# EAGLE board Pi_Tracker1 (EAGLE 6.5.0)
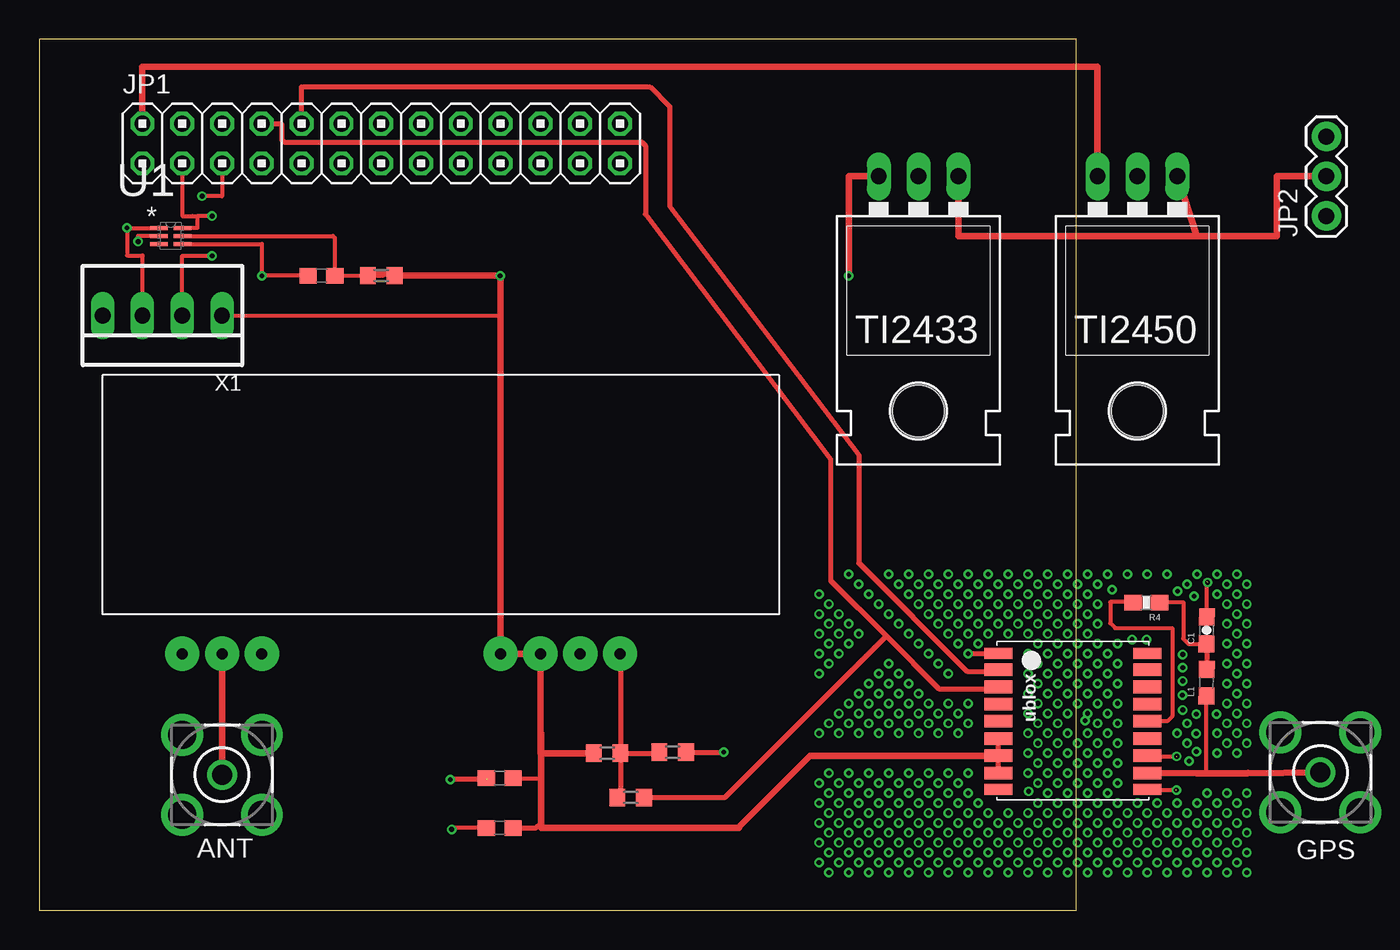
[diagram p0: board, top side]
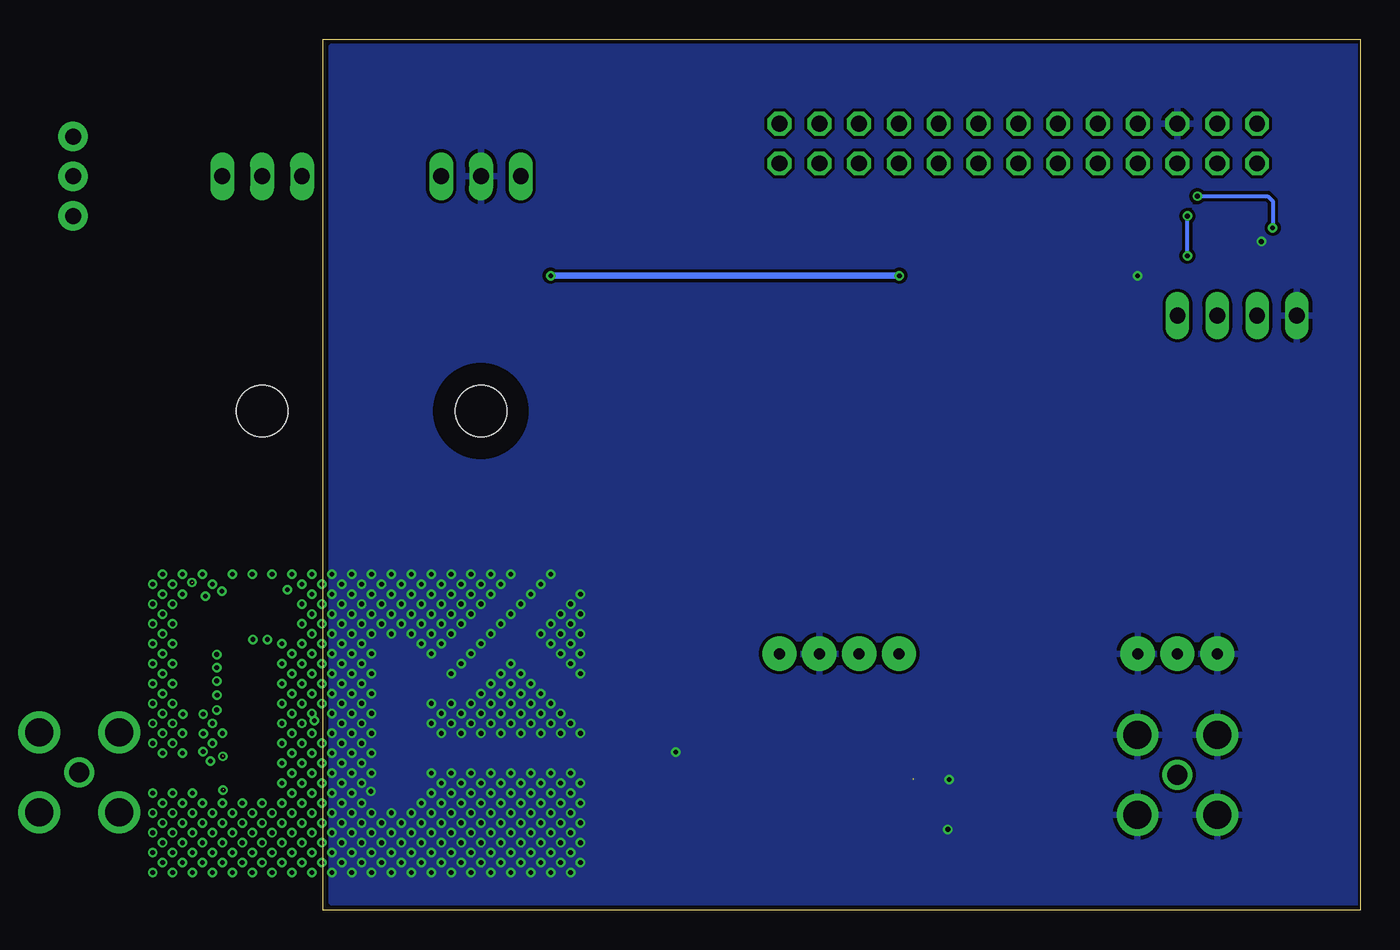
[diagram p1: board, bottom side, seen from below]

Size 66.2 x 55.61 mm. Coordinates in mm from the lower left corner, seen from the top.
Outline: 0,0 66.2,0 66.2,55.61 0,55.61 0,0
Copper layers (1*16): Top 0.035mm / dielectric 1.5mm / Bottom 0.035mm
Design rules "hackvana": minimum track width 6mil, minimum drill 0.3mm, track to track 6mil, track to pad 6mil, pad to pad 6mil, via to via 6mil, smd to smd 0mil, copper to edge 6mil, drill to drill 6mil, minimum pad ring 10mil, minimum via ring 6mil, stop-mask expansion 2mil, vias tented up to drill 100mil, thermal gap 10mil
Net classes: 0 default: clearance 0.205 mm

## Footprints (pad centres in the part's own frame; a part is rotated, then mirrored left to right if it is on the bottom)
BUS-SMA = drill 1.27: 1 0,0 | drill 1.778: 2 -2.55,2.55; 3 2.55,2.55; 4 2.55,-2.55; 5 -2.55,-2.55
0603-CAP = smd 1.1 x 1: 1 -0.85,0; 2 0.85,0
C0603 = smd 1.1 x 1: 1 -0.85,0; 2 0.85,0
2X13 = drill 1.016 octagon: 1 -15.24,-1.27; 2 -15.24,1.27; 3 -12.7,-1.27; 4 -12.7,1.27; 5 -10.16,-1.27; 6 -10.16,1.27; 7 -7.62,-1.27; 8 -7.62,1.27; 9 -5.08,-1.27; 10 -5.08,1.27; 11 -2.54,-1.27; 12 -2.54,1.27; 13 0,-1.27; 14 0,1.27; 15 2.54,-1.27; 16 2.54,1.27; 17 5.08,-1.27; 18 5.08,1.27; 19 7.62,-1.27; 20 7.62,1.27; 21 10.16,-1.27; 22 10.16,1.27; 23 12.7,-1.27; 24 12.7,1.27; 25 15.24,-1.27; 26 15.24,1.27
1X03 = drill 1.016 pad 1.88: 1 0,0; 2 2.54,0; 3 5.08,0
0603 = smd 1.1 x 1: 1 -0.85,0; 2 0.85,0
R0603 = smd 1 x 1.1: 1 -0.85,0; 2 0.85,0
0603-RES = smd 1.1 x 1: 1 -0.85,0; 2 0.85,0
TO-220-ALT = drill 1.016 long: GND 0,-3.81; IN -2.54,-3.81; OUT 2.54,-3.81 | hole 3.302: 0,11.176
SOT50P160X60-6N = smd 1.118 x 0.254: 1 -0.737,0.508; 2 -0.737,0; 3 -0.737,-0.508; 4 0.737,-0.508; 5 0.737,0; 6 0.737,0.508
NTX2 = drill 0.7 pad 2.184: 0V -2.54,-10.16; EN -7.62,-10.16; RFGND -22.86,-10.16; RFGND2 -27.94,-10.16; RFOUT -25.4,-10.16; TXD 0,-10.16; VCC -5.08,-10.16
UBLOX_MAX = smd 1.8 x 0.7: 1_GND 4.95,-4.4; 9_V_RESET 4.95,4.3; 10_GND -4.55,4.3; 18_RESERVED -4.55,-4.4 | smd 1.8 x 0.8: 2_TXD1 4.95,-3.35; 3_RXD1 4.95,-2.25; 4_TIMEPULSE 4.95,-1.15; 5_EXTINT0 4.95,-0.05; 6_V_BCKP 4.95,1.05; 7_VCC_IO 4.95,2.15; 8_VCC 4.95,3.25; 11_RF_IN -4.55,3.25; 12_GND -4.55,2.15; 13_ANTON -4.55,1.05; 14_VCC_RF -4.55,-0.05; 15_RESERVED -4.55,-1.15; 16_SDA2 -4.55,-2.25; 17_SCL2 -4.55,-3.35
22-23-2041 = drill 1 long: 1 -3.81,0; 2 -1.27,0; 3 1.27,0; 4 3.81,0

## Placement (x,y rotation side)
ANT  BUS-SMA  [BUS-SMA]  11.67,8.65 0 top
C1  47pf  [0603-CAP]  74.51,17.87 89.2 top  (outside the outline)
C2  20nf  [C0603]  18.02,40.51 0 top
C3  1.0uf  [C0603]  29.39,5.26 0 top
C4  0.1uf  [C0603]  29.39,8.43 0 top
GPS  BUS-SMA  [BUS-SMA]  81.77,8.81 0 top  (outside the outline)
JP1  [2X13]  21.83,48.95 0 top
JP2  [1X03]  82.16,44.32 90 top  (outside the outline)
L1  27nh  [0603]  74.51,14.53 89.4 top  (outside the outline)
R1  32k  [R0603]  37.75,7.21 0 top
R2  4k7  [R0603]  36.25,10.04 180 top
R3  4k7  [R0603]  40.44,10.1 180 top
R4  10 ohm  [0603-RES]  70.67,19.65 180 top  (outside the outline)
R5  4k7  [R0603]  21.83,40.51 0 top
TI2433  3v3  [TO-220-ALT]  56.12,43.05 180 top
TI2450  5v  [TO-220-ALT]  70.09,43.05 180 top
U1  TMP102AIDRLT  [SOT50P160X60-6N]  8.4,43.05 0 top
U$1  NTX2  [NTX2]  37.07,26.54 0 top
U$2  UBLOX_MAX  [UBLOX_MAX]  66.17,12.02 180 top
X1  22-23-2041  [22-23-2041]  7.86,37.97 180 top

## Library data of the parts
ANT GPS U$1 U$2 = Ava
C1 = SparkFun-Capacitors
C2-C4 R1-R3 R5 = rcl
JP1 = pinhead
JP2 = SparkFun-Connectors
L1 = SparkFun-Passives
R4 = SparkFun-Resistors
TI2433 TI2450 = SparkFun-PowerIC
U1 = Ava; MPN: TMP102AIDRLT; OC_FARNELL: 1652477; OC_NEWARK: 53M3987; PACKAGE: SOT-23-6; SUPPLIER: Texas Instruments
X1 = con-molex; MF: MOLEX; MPN: 22-23-2041; OC_FARNELL: 1462920; OC_NEWARK: 38C0355

## Nets
3V3: C2.2 C3.2 C4.2 R2.2 R5.1 R5.2 TI2433.OUT U1.5 U$1.EN U$1.VCC U$2.6_V_BCKP U$2.7_VCC_IO U$2.8_VCC X1.1
9_V_RESET: U$2.9_V_RESET
GND: ANT.2 ANT.3 ANT.4 ANT.5 C1.2 C2.1 C3.1 C4.1 GPS.2 GPS.3 GPS.4 GPS.5 JP1.6 JP2.1 JP2.3 R3.1 TI2433.GND TI2450.GND U1.2 U1.4 U$1.0V U$1.RFGND U$1.RFGND2 U$2.1_GND U$2.10_GND U$2.12_GND X1.4
N$1: JP1.2 TI2450.OUT
N$2: R4.2 U$2.14_VCC_RF
N$3: C1.1 L1.2 R4.1
N$6: R1.1 R2.1 R3.2 U$1.TXD
N$9: ANT.1 U$1.RFOUT
N$13: GPS.1 L1.1 U$2.11_RF_IN
RXD: JP1.10 U$2.2_TXD1
SCL: JP1.5 U1.1 X1.3
SDA: JP1.3 U1.6 X1.2
TXD: JP1.8 R1.2 U$2.3_RXD1
VCC: JP2.2 TI2433.IN TI2450.IN

## Tracks (layer width: path | path; a pad name or v marks a point on that pad's centre or on a via)
3V3  (via drill 0.3)
  Top 0.152: R5.2 R5.1
  Top 0.254: R5.1 22.25,40.83 21.93,40.51 C2.2 18.87,42.92 18.73,43.05 U1.5 | X1.1 29.45,37.97 | C4.2 32.02,8.43 32.02,8.13
  Top 0.305: U$2.6_V_BCKP U$2.7_VCC_IO U$2.8_VCC | R2.2 | C3.2 31.69,5.26 32.02,5.59
  Top 0.406: TI2433.OUT 51.68,46.86 v51.68,40.51 | R5.2 v29.42,40.51 29.45,40.48 29.45,37.97 U$1.EN U$1.VCC 31.99,11.3 | 35.22,9.87 R2.2 32,10.04 31.99,10.03 31.99,11.3 | U$2.7_VCC_IO 49.2,9.87 44.66,5.34 44.66,5.27 32.02,5.27 32.02,5.59 32.02,8.13 32.02,11.3 31.99,11.3
  Bottom 0.406: v51.68,40.51 v29.42,40.51
GND  (via drill 0.3)  (4 unrouted)
  Top 0.254: C2.1 v14.21,40.51 14.21,42.54 U1.4 | U$2.10_GND 72.55,7.71 | U$2.12_GND 70.75,9.83 72.58,9.83 | C1.2 74.52,20.96 74.55,20.98 | U1.2 6.32,43.05 v6.32,42.69 | C3.1 26.33,5.26 v26.33,5.17
  Top 0.305: R3.1 v43.68,10.1 | U$2.1_GND 61.19,16.38 v59.3,16.38 | 28.54,8.34 28.53,8.35 v26.24,8.35
  other vias: 72.58,7.68 72.61,9.83 74.58,20.93 63.15,7.6 63.11,8.76 63.11,10.03 63.11,11.3 63.11,12.57 63.11,13.84 63.11,15.11 63.11,16.38 63.11,17.65 63.11,18.92 63.11,20.19 63.11,21.46 64.38,21.46 64.38,20.19 64.38,18.92 64.38,17.65 64.38,16.38 64.38,15.11 64.38,13.84 64.38,12.57 64.38,11.3 64.38,10.03 64.38,8.76 64.38,7.49 64.38,6.22 64.38,4.95 64.38,3.68 63.11,3.68 63.11,4.95 63.11,6.22 61.84,6.22 61.84,4.95 61.84,3.68 60.57,3.68 60.57,4.95 60.57,6.22 65.65,3.68 65.65,4.95 65.65,6.22 65.65,7.49 65.65,8.76 65.65,10.03 65.65,11.3 65.65,12.57 65.65,13.84 65.65,15.11 65.65,16.38 65.65,17.65 65.65,18.92 65.65,20.19 65.65,21.46 66.92,3.68 66.92,4.95 66.92,6.22 66.92,7.49 66.92,8.76 66.92,10.03 66.92,11.3 66.92,12.57 66.92,13.84 66.92,15.11 66.92,16.38 66.92,17.65 66.92,18.92 66.92,20.19 66.92,21.46 61.84,17.65 61.84,18.92 61.84,20.19 61.84,21.46 60.57,17.65 60.57,18.92 60.57,20.19 60.57,21.46 68.19,3.68 68.19,4.95 68.19,6.22 68.19,7.49 68.19,8.76 68.19,10.03 68.19,11.3 68.19,12.57 68.19,13.84 68.19,15.11 68.19,16.38 68.19,21.46 69.46,3.68 69.46,4.95 69.46,6.22 70.73,3.68 70.73,4.95 70.73,6.22 72,3.68 72,4.95 72,6.22 73.27,3.68 73.27,4.95 74.54,3.68 74.54,4.95 72.63,11.3 73.27,10.67 73.27,11.94 73.27,20.83 69.46,21.46 70.73,21.46 72,21.46 76.44,13.84 76.44,15.11 76.44,16.38 76.44,17.65 76.44,18.92 76.44,20.19 76.44,21.46 75.81,3.68 68.82,11.94 68.82,13.21 68.82,14.48 68.82,15.75 68.82,10.67 68.82,9.4 68.82,8.13 67.55,8.13 67.55,9.4 67.55,10.67 67.55,11.94 67.55,13.21 67.55,14.48 67.55,15.75 66.28,15.75 66.28,14.48 66.28,13.21 66.76,12.12 66.28,10.67 66.28,9.4 66.28,8.13 65.01,8.13 65.01,9.4 65.01,10.67 65.01,11.94 65.01,13.21 65.01,14.48 65.01,15.75 63.74,8.13 63.74,9.4 63.74,10.67 63.74,11.94 63.74,13.21 63.74,14.48 63.74,15.75 62.47,4.32 61.2,4.32 63.74,4.32 65.01,4.32 66.28,4.32 67.55,4.32 68.82,4.32 70.09,4.32 71.36,4.32 72.63,4.32 73.9,4.32 75.17,4.32 73.9,5.59 72.63,5.59 71.36,5.59 70.09,5.59 68.82,5.59 67.55,5.59 66.28,5.59 65.01,5.59 63.74,5.59 62.47,5.59 61.2,5.59 63.74,6.86 65.01,6.86 66.28,6.86 67.55,6.86 68.82,6.86 70.09,6.86 71.36,6.86 61.2,18.29 62.47,18.29 63.74,18.29 65.01,18.29 66.28,18.29 67.55,18.29 67.55,19.56 66.28,19.56 65.01,19.56 63.74,19.56 62.47,19.56 61.2,19.56 61.2,20.83 62.47,20.83 63.74,20.83 65.01,20.83 66.28,20.83 67.55,20.83 73.9,21.46 75.81,20.83 68.82,17.02 63.74,17.02 65.01,17.02 66.28,17.02 67.55,17.02 59.93,4.32 59.93,5.59 59.93,6.86 59.93,18.29 59.93,19.56 59.93,20.83 59.93,3.05 61.2,3.05 62.47,3.05 63.74,3.05 65.01,3.05 66.28,3.05 67.55,3.05 68.82,3.05 70.09,3.05 71.36,3.05 72.63,3.05 73.9,3.05 75.17,3.05 75.81,2.41 74.54,2.41 73.27,2.41 72,2.41 70.73,2.41 69.46,2.41 68.19,2.41 66.92,2.41 65.65,2.41 64.38,2.41 63.11,2.41 61.84,2.41 60.57,2.41 73.39,9.53 73.85,11.27 72.99,12.8 72.96,13.73 72.99,14.64 72.99,15.5 72.99,16.34 70.68,17.29 69.75,17.29 68.48,20.48 73.72,20.05 72.66,20.37 73.85,12.53 73.86,10.14 75.17,20.19 75.81,19.56 75.81,17.02 75.81,18.29 75.81,15.75 75.81,14.48 75.81,13.21 75.14,12.53 73.27,6.22 72.63,6.86 75.81,4.95 75.17,5.59 75.81,6.22 74.54,6.22 73.9,6.86 75.17,6.86 75.81,7.49 74.54,7.49 75.17,11.3 75.81,11.94 75.81,10.67 75.17,10.03 76.44,12.57 76.44,11.3 76.44,10.03 77.08,10.67 77.08,11.94 77.08,13.21 77.08,14.48 77.08,15.75 77.08,17.02 77.08,18.29 77.08,19.56 77.08,20.83 75.17,21.46 76.44,3.05 77.08,2.41 77.08,3.68 77.08,4.95 77.08,6.22 77.08,7.49 76.44,6.86 76.44,5.59 76.44,4.32 59.3,6.22 59.3,2.41 59.3,3.68 59.3,4.95 59.3,7.49 59.3,8.76 58.66,3.05 58.66,4.32 58.66,5.59 58.66,6.86 58.66,8.13 58.03,6.22 58.03,4.95 58.03,7.49 58.03,8.76 58.03,3.68 58.03,2.41 57.39,3.05 57.39,4.32 57.39,5.59 57.39,6.86 57.39,8.13 56.76,8.76 56.76,7.49 56.76,6.22 56.76,4.95 56.76,3.68 56.76,2.41 59.3,21.46 59.3,20.19 59.3,18.92 59.3,17.65 58.03,17.65 56.76,18.92 55.49,20.19 54.22,21.46 56.12,19.56 54.85,20.83 57.39,18.29 58.66,17.02 58.66,18.29 58.03,18.92 57.39,19.56 56.76,20.19 56.12,20.83 55.49,21.46 58.03,20.19 57.39,20.83 56.76,21.46 58.03,21.46 58.66,20.83 58.66,19.56 59.93,17.02 52.31,20.83 52.95,20.19 51.68,21.46 53.58,19.56 54.22,18.92 54.85,18.29 55.49,17.65 56.12,17.02 56.76,16.38 57.39,15.75 58.03,15.11 49.77,20.19 50.41,19.56 51.04,18.92 51.68,18.29 52.31,17.65 54.22,15.75 54.85,15.11 55.49,14.48 56.12,13.84 56.76,13.21 58.03,13.21 59.3,13.21 49.77,18.92 49.77,17.65 49.77,16.38 49.77,15.11 50.41,18.29 50.41,17.02 50.41,15.75 51.04,16.38 51.68,17.02 51.04,17.65 53.58,15.11 52.95,14.48 52.31,13.84 51.68,13.21 51.04,12.57 50.41,11.94 49.77,11.3 51.04,11.3 51.68,11.94 52.31,12.57 52.95,13.21 53.58,13.84 54.22,14.48 52.31,11.3 53.58,11.3 54.85,11.3 56.12,11.3 57.39,11.3 58.66,11.3 55.49,13.21 54.85,12.57 54.22,11.94 55.49,11.94 56.12,12.57 57.39,12.57 56.76,11.94 58.03,11.94 58.66,12.57 59.3,11.94 54.85,13.84 54.22,13.21 53.58,12.57 52.95,11.94 55.49,8.76 54.22,8.76 52.95,8.76 51.68,8.76 50.41,8.76 55.49,7.49 54.22,7.49 52.95,7.49 51.68,7.49 50.41,7.49 50.41,6.22 51.68,6.22 52.95,6.22 54.22,6.22 55.49,6.22 55.49,4.95 54.22,4.95 52.95,4.95 51.68,4.95 50.41,4.95 50.41,3.68 51.68,3.68 52.95,3.68 54.22,3.68 55.49,3.68 55.49,2.41 54.22,2.41 52.95,2.41 51.68,2.41 50.41,2.41 56.12,8.13 54.85,8.13 53.58,8.13 52.31,8.13 51.04,8.13 51.04,6.86 51.04,5.59 51.04,4.32 51.04,3.05 52.31,3.05 52.31,4.32 52.31,5.59 52.31,6.86 53.58,6.86 54.85,6.86 56.12,6.86 56.12,5.59 54.85,5.59 53.58,5.59 53.58,4.32 54.85,4.32 56.12,4.32 56.12,3.05 54.85,3.05 53.58,3.05 49.77,8.13 49.77,6.86 49.77,5.59 49.77,4.32 49.77,3.05
  pour Bottom: 0.24,55.12 65.65,55.12 65.65,0.51 0.24,0.51
N$1
  Top 0.406: JP1.2 6.59,53.85 67.55,53.85 TI2450.OUT
N$2
  Top 0.254: R4.2 69.77,19.69 68.37,19.69 68.37,18.33 68.68,18.02 72.31,18.02 72.31,12.38 72,12.07 U$2.14_VCC_RF
N$3
  Top 0.254: R4.1 71.56,19.69 73.02,19.69 73.02,17.34 73.34,17.02 C1.1
  Top 0.305: C1.1 74.5,16.85 74.54,16.85 | 74.54,16.85 74.54,17.06 | 74.54,16.85 74.54,15.38 L1.2 | R4.1
N$6
  Top 0.305: R2.1 39.52,10.04 R3.2 | R2.1 37.1,7.4 R1.1 | U$1.TXD 37.1,16.36 R2.1
  Top 0.406: U$1.TXD
N$9
  Top 0.406: U$1.RFOUT ANT.1
N$13
  Top 0.254: 74.5,8.76 L1.1
  Top 0.305: 77.15,8.82 77.1,8.76 | 74.5,8.76 73.9,8.76
  Top 0.406: U$2.11_RF_IN 73.9,8.76 74.74,8.76 77.1,8.76 GPS.1
RXD
  Top 0.305: JP1.10 16.75,52.58 38.98,52.58 40.25,51.31 40.25,44.96 52.31,29.08 52.31,22.17 59.22,15.26 61.11,15.26 U$2.2_TXD1
SCL  (via drill 0.3)
  Top 0.254: JP1.5 11.67,45.59 v10.4,45.59 | U1.1 v5.6,43.57 5.61,43.57 5.61,41.81 6.6,41.81 6.6,41.77 6.59,41.77 X1.3
  Bottom 0.254: v10.4,45.59 5.91,45.59 5.6,45.27 v5.6,43.57
SDA  (via drill 0.3)
  Top 0.254: JP1.3 9.13,44.32 9.77,44.32 10.1,44.32 | 10.1,44.32 10.1,43.55 U1.6 | X1.2 9.13,41.78 v11.04,41.78 | v11.04,44.32 10.1,44.32
  Top 0.406: JP1.3
  Bottom 0.254: v11.04,41.78 v11.04,44.32
TXD
  Top 0.305: 61.11,14.16 U$2.3_RXD1 61.1,14.14 57.43,14.14 54.07,17.51 | R1.2 43.77,7.21 54.07,17.51 | JP1.8 15.42,50.22 15.48,50.16 15.48,49.19 15.63,49.04 38.47,49.04 38.69,48.82 38.69,44.44 50.52,28.8 50.52,21.06 54.07,17.51
  Top 0.406: 61.17,14.22 U$2.3_RXD1
VCC
  Top 0.406: JP2.2 78.98,46.86 78.98,43.05 73.9,43.05 | 73.9,43.05 TI2450.IN | TI2433.IN 58.66,43.05 73.9,43.05